# EAGLE board UAV_ARM_Revision_2 (EAGLE 7.1.0)
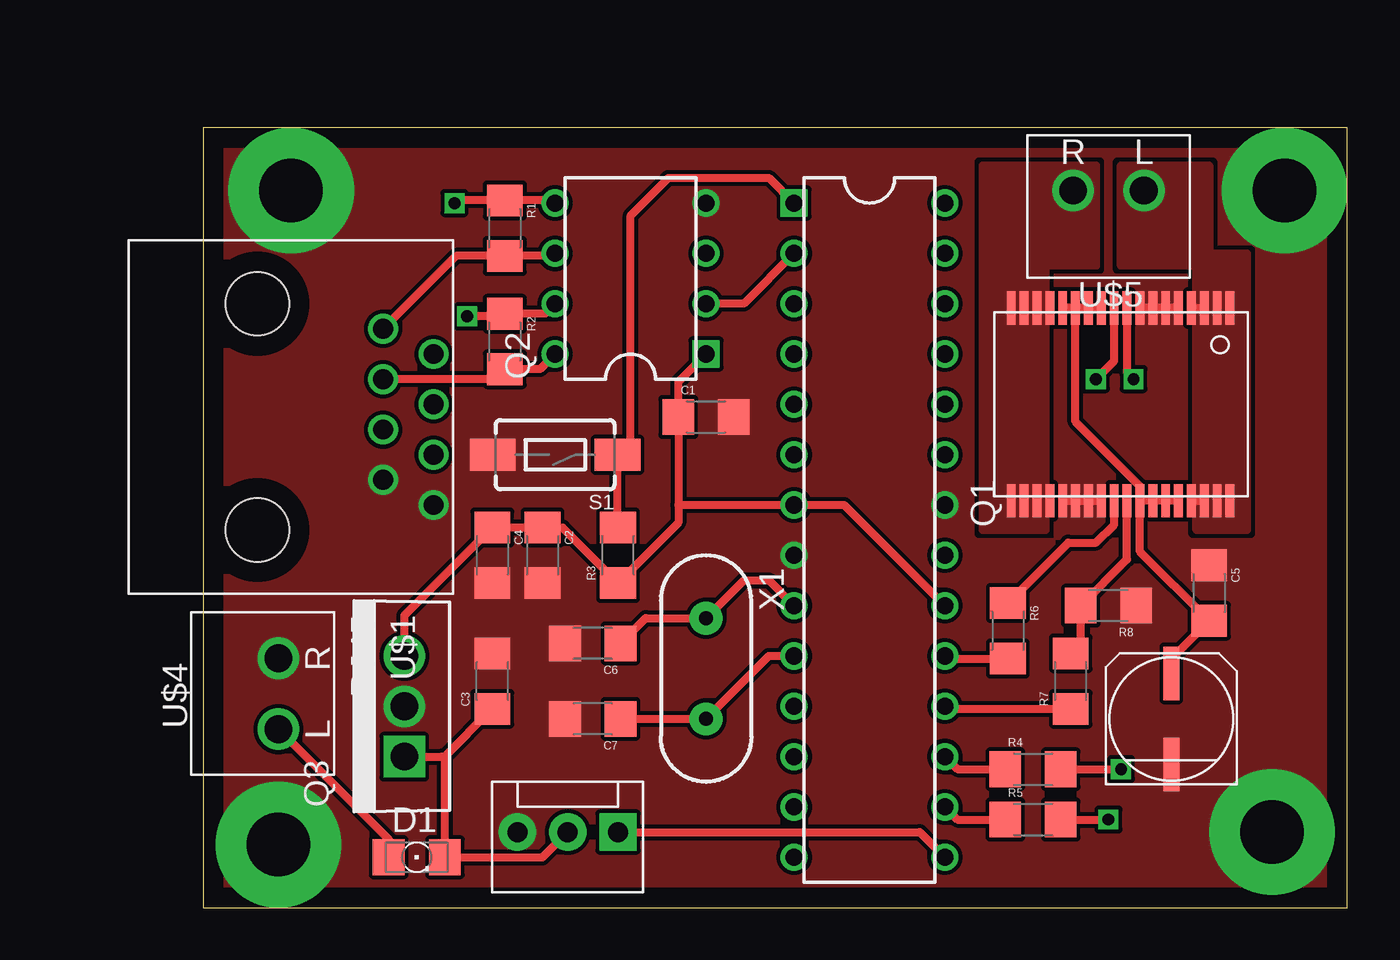
[diagram p0: board, top side]
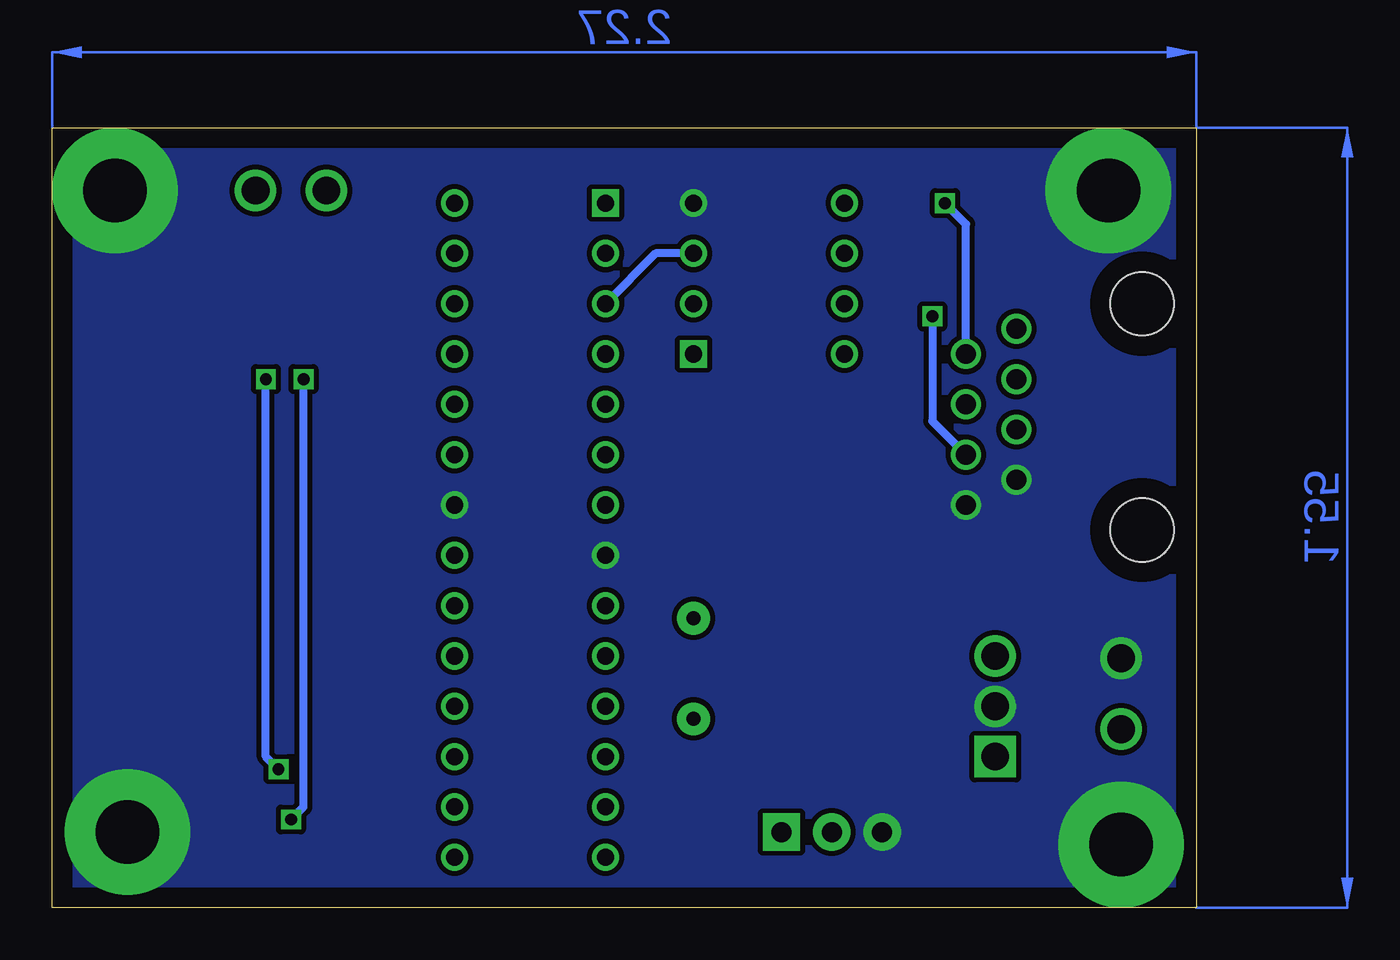
[diagram p1: board, bottom side, seen from below]

Size 57.78 x 39.37 mm. Coordinates in mm from the lower left corner, seen from the top.
Outline: 0,39.37 0,0 57.78,0 57.78,39.37 0,39.37
Copper layers (1*16): Top 0.035mm / dielectric 1.5mm / Bottom 0.035mm
Design rules "default": minimum track width 10mil, minimum drill 24mil, track to track 8mil, track to pad 8mil, pad to pad 8mil, via to via 8mil, smd to smd 8mil, copper to edge 40mil, drill to drill 8mil, minimum pad ring 10mil, minimum via ring 8mil, stop-mask expansion 4mil, vias tented up to drill 0mil, thermal gap 10mil
Net classes: 0 default: clearance 0.205 mm

## Footprints (pad centres in the part's own frame; a part is rotated, then mirrored left to right if it is on the bottom)
1206 = smd 1.6 x 1.8: 1 -1.4,0; 2 1.4,0
FKIT-LED-1206 = smd 1.6 x 1.803: A -1.422,0; C 1.422,0
MOLEX-1X3 = drill 1.016 pad 1.88 square: 1 0,0 | drill 1.016 pad 1.88: 2 2.54,0; 3 5.08,0
DIP28 = drill 0.864 square: 1 -16.51,-3.81 | drill 0.864: 2 -13.97,-3.81; 3 -11.43,-3.81; 4 -8.89,-3.81; 5 -6.35,-3.81; 6 -3.81,-3.81; 7 -1.27,-3.81; 8 1.27,-3.81; 9 3.81,-3.81; 10 6.35,-3.81; 11 8.89,-3.81; 12 11.43,-3.81; 13 13.97,-3.81; 14 16.51,-3.81; 15 16.51,3.81; 16 13.97,3.81; 17 11.43,3.81; 18 8.89,3.81; 19 6.35,3.81; 20 3.81,3.81; 21 1.27,3.81; 22 -1.27,3.81; 23 -3.81,3.81; 24 -6.35,3.81; 25 -8.89,3.81; 26 -11.43,3.81; 27 -13.97,3.81; 28 -16.51,3.81
DIP8 = drill 0.864 square: 1 -3.81,-3.81 | drill 0.864: 2 -1.27,-3.81; 3 1.27,-3.81; 4 3.81,-3.81; 5 3.81,3.81; 6 1.27,3.81; 7 -1.27,3.81; 8 -3.81,3.81
TO-220 = drill 1.397 square: 1 -2.54,0 | drill 1.397: 2 0,0; 3 2.54,0
TACTILE-SWITCH-1101NE = smd 2.3 x 1.6: 1 -3.15,0; 2 3.15,0
STANDOFF-ELECTRICAL = drill 3.2 pad 6.35: P1 0,0
RJ45-CAT5E = drill 1: 1 -4.445,4.655; 2 -3.175,7.195; 3 -1.905,4.655; 4 -0.635,7.195; 5 0.635,4.655; 6 1.905,7.195; 7 3.175,4.655; 8 4.445,7.195 | hole 3.2: 5.715,-1.695; -5.715,-1.695
BTM7752G = smd 1.67 x 0.45: P$1 -4.865,5.5; P$2 -4.865,4.85; P$3 -4.865,4.2; P$4 -4.865,3.55; P$5 -4.865,2.9; P$6 -4.865,2.25; P$7 -4.865,1.6; P$8 -4.865,0.95; P$9 -4.865,0.3; P$10 -4.865,-0.35; P$11 -4.865,-1; P$12 -4.865,-1.65; P$13 -4.865,-2.3; P$14 -4.865,-2.95; P$15 -4.865,-3.6; P$16 -4.865,-4.25; P$17 -4.865,-4.9; P$18 -4.865,-5.55; P$19 4.865,-5.55; P$20 4.865,-4.9; P$21 4.865,-4.25; P$22 4.865,-3.6; P$23 4.865,-2.95; P$24 4.865,-2.3; P$25 4.865,-1.65; P$26 4.865,-1; P$27 4.865,-0.35; P$28 4.865,0.3; P$29 4.865,0.95; P$30 4.865,1.6; P$31 4.865,2.25; P$32 4.865,2.9; P$33 4.865,3.55; P$34 4.865,4.2; P$35 4.865,4.85; P$36 4.865,5.5
ELECTRO-CAP = smd 2.7 x 0.8: NEG -2.3,0; POS 2.3,0
691321100002 = drill 1.4: L -1.79,0; R 1.79,0
HC49US = drill 0.7 pad 1.651: 1 -2.54,0; 2 2.54,0

## Placement (x,y rotation side)
C1  0.1uF  [1206]  25.4,24.77 0 top
C2  1uF  [1206]  17.14,17.78 270 top
C3  0.1uF  [1206]  14.61,11.43 90 top
C4  0.1uF  [1206]  14.61,17.78 270 top
C5  0.1uF  [1206]  50.8,15.88 270 top
C6  22pF  [1206]  19.68,13.34 180 top
C7  22pF  [1206]  19.68,9.53 180 top
D1  [FKIT-LED-1206]  10.79,2.54 0 top
JP1  [MOLEX-1X3]  20.95,3.81 180 top
Q1  Q_ATMEGA328P  [DIP28]  33.66,19.05 270 top
Q2  Q_LTC490  [DIP8]  21.59,31.75 90 top
Q3  Q_LDO  [TO-220]  10.16,10.16 90 top
R1  120  [1206]  15.24,34.29 270 top
R2  120  [1206]  15.24,28.57 270 top
R3  10K  [1206]  20.95,17.78 90 top
R4  4.7k  [1206]  41.91,6.98 0 top
R5  4.7k  [1206]  41.91,4.45 0 top
R6  4.7k  [1206]  40.64,13.97 270 top
R7  4.7k  [1206]  43.81,11.43 90 top
R8  1K  [1206]  45.72,15.24 180 top
S1  SWITCH-MOMENTARY-2-SMD-1101NE  [TACTILE-SWITCH-1101NE]  17.78,22.86 180 top
S2  STANDOFF_ELECTRICAL  [STANDOFF-ELECTRICAL]  4.45,36.2 0 top
S3  STANDOFF_ELECTRICAL  [STANDOFF-ELECTRICAL]  54.61,36.2 0 top
S4  STANDOFF_ELECTRICAL  [STANDOFF-ELECTRICAL]  3.81,3.18 0 top
S5  STANDOFF_ELECTRICAL  [STANDOFF-ELECTRICAL]  53.98,3.81 0 top
U$1  RJ45  [RJ45-CAT5E]  4.45,24.77 270 top
U$2  BTM7752G  [BTM7752G]  46.35,25.4 270 top
U$3  100UF-ELECTRO-CAP  [ELECTRO-CAP]  48.9,9.53 90 top
U$4  H_WR-TBL_321*0002VERT  [691321100002]  3.81,10.79 90 top
U$5  H_WR-TBL_321*0002VERT  [691321100002]  45.72,36.2 180 top
X1  [HC49US]  25.4,12.07 270 top

## Library data of the parts
C1 C2 C4-C7 R1-R8 = SparkFun-Passives
C3 = SparkFun-Capacitors
D1 = SparkFun-LED
JP1 = SparkFun-Connectors
Q1 Q2 U$1 = MRDT-2014-All
Q3 U$2 = MRDT-2015-General
S1-S5 = SparkFun-Electromechanical
U$3 = New
U$4 U$5 = MRDT-2015-PowerBoard; DIGIKEY_PN: 732-2763-ND
X1 = SparkFun-FreqCtrl

## Nets
5V: C1.1 C2.1 C4.1 Q1.7 Q1.20 Q2.1 Q3.3 R3.1
GND: C1.2 C2.2 C3.2 C4.2 C5.1 C6.2 C7.2 JP1.3 Q1.8 Q1.22 Q2.4 Q3.2 R8.1 S1.2 S2.P1 S3.P1 S4.P1 S5.P1 U$1.7 U$1.8 U$2.P$5 U$2.P$6 U$2.P$7 U$2.P$8 U$2.P$23 U$2.P$24 U$2.P$25 U$2.P$26 U$3.NEG U$4.R
IN1: Q1.17 R4.1
IN2: Q1.16 R5.1
IS: Q1.18 R7.1
N$1: Q2.8 R2.2 U$1.3
N$2: Q2.7 R2.1 U$1.6
N$3: Q2.5 R1.1 U$1.2
N$4: Q2.6 R1.2 U$1.1
N$5: D1.A U$4.L
N$6: R5.2 U$2.P$10
N$7: R4.2 U$2.P$9
N$8: R7.2 R8.2 U$2.P$28
N$9: Q1.1 R3.2 S1.1
N$10: C6.1 Q1.9 X1.1
N$11: C7.1 Q1.10 X1.2
N$12: R6.1 U$2.P$27
N$17: C5.2 U$2.P$11 U$2.P$12 U$2.P$13 U$2.P$14 U$2.P$29 U$2.P$30 U$2.P$31 U$2.P$32 U$3.POS
NH: Q1.19 R6.2
OUT1: U$2.P$1 U$2.P$2 U$2.P$3 U$2.P$4 U$2.P$33 U$2.P$34 U$2.P$35 U$2.P$36 U$5.L
OUT2: U$2.P$15 U$2.P$16 U$2.P$17 U$2.P$18 U$2.P$19 U$2.P$20 U$2.P$21 U$2.P$22 U$5.R
PB1: JP1.1 Q1.15
RX_1: Q1.2 Q2.2
TX_1: Q1.3 Q2.3
VIN: C3.1 D1.C JP1.2 Q3.1

## Tracks (layer width: path | path; a pad name or v marks a point on that pad's centre or on a via)
5V
  Top 0.406: Q1.20 32.38,20.32 Q1.7 24,20.32 | 24,20.32 C1.1 24,26.54 Q2.1 | 24,20.32 24,19.43 R3.1 18.16,19.18 C2.1 C4.1 10.16,14.74 Q3.3
GND
  Top 0.406: U$2.P$23 U$2.P$24 U$2.P$25 U$2.P$26 | U$2.P$5 U$2.P$6 U$2.P$7 U$2.P$8
  pour Bottom (isolate 0.254, no thermals): 0,0 57.78,0 57.78,39.37 0,39.37
  pour Top (rank 2, no thermals): 0,39.37 57.78,39.37 57.78,0 0,0
IN1
  Top 0.406: Q1.17 38.1,6.98 R4.1
IN2
  Top 0.406: Q1.16 38.1,4.45 R5.1
IS
  Top 0.406: Q1.18 37.59,10.03 R7.1
N$1
  Top 0.406: Q2.8 17.02,27.18 R2.2 14.73,26.67 U$1.3
N$2  (via drill 0.6)
  Top 0.406: Q2.7 17.27,29.97 R2.1 15.11,29.85 v13.34,29.85
  Bottom 0.406: v13.34,29.85 13.34,24.56 U$1.6
N$3  (via drill 0.6)
  Top 0.406: Q2.5 17.65,35.69 R1.1 12.83,35.69 v12.7,35.56
  Bottom 0.406: U$1.2 11.64,34.5 v12.7,35.56
N$4
  Top 0.406: Q2.6 17.65,32.89 R1.2 12.78,32.89 U$1.1
N$5
  Top 0.406: D1.A 9.37,3.44 U$4.L
N$6  (via drill 0.6)
  Top 0.406: v45.09,26.67 46.01,27.59 U$2.P$10 | R5.2 v45.72,4.45
  Bottom 0.406: v45.72,4.45 45.09,5.08 v45.09,26.67
N$7  (via drill 0.6)
  Top 0.406: R4.2 v46.35,6.98 | U$2.P$9 46.66,27 v46.99,26.67
  Bottom 0.406: v46.35,6.98 46.99,7.62 v46.99,26.67
N$8
  Top 0.406: U$2.P$28 46.66,17.57 R8.2 44.32,13.34 R7.2
N$9
  Top 0.406: Q1.1 28.57,36.83 23.5,36.83 21.59,34.92 21.59,23.52 S1.1 20.93,19.07 20.95,19.05 R3.2
N$10
  Top 0.406: C6.1 22.36,14.61 X1.1 27.3,16.51 28.57,16.51 Q1.9
N$11
  Top 0.406: C7.1 X1.2 28.57,12.7 Q1.10
N$12
  Top 0.406: R6.1 43.69,18.42 45.09,18.42 46.01,19.34 U$2.P$27
N$17
  Top 0.406: U$2.P$29 47.3,21.28 44.05,24.53 U$2.P$13 | U$2.P$32 U$2.P$31 U$2.P$30 U$2.P$29 | U$2.P$11 U$2.P$12 U$2.P$13 | U$2.P$13 U$2.P$14 | U$3.POS 48.9,12.57 C5.2 47.3,17.97 U$2.P$29
NH
  Top 0.406: Q1.19 37.59,12.57 R6.2
OUT1
  Top 0.406: U$2.P$33 U$2.P$34 | U$2.P$4 U$2.P$3
  pour Top (no thermals): 46.35,37.47 50.8,37.47 50.8,33.02 52.7,33.02 52.7,19.05 50.16,19.05 50.16,32.39 46.35,32.39
OUT2
  pour Top (no thermals): 45.09,37.47 45.09,32.39 42.55,32.39 42.55,19.05 39.37,19.05 39.37,37.47
PB1
  Top 0.406: JP1.1 36.2,3.81 Q1.15
RX_1
  Top 0.406: Q1.2 27.3,30.48 Q2.2
TX_1
  Bottom 0.406: Q2.3 27.3,33.02 Q1.3
VIN
  Top 0.406: Q3.1 12.06,7.62 | 12.06,7.62 12.2,7.62 C3.1 | 12.06,7.62 12.22,7.47 D1.C 17.14,2.54 JP1.2
(copper drawn outside any net)
  shapes: Bottom area x2